# Altium PCB SSOP20.PcbDoc
Units mil, origin at the board's own origin, x right, y up, seen from the top; angles counter-clockwise.
Board outline 835 x 535 mil, 2 copper layers (Top Layer, Bottom Layer); 3 components, 142 nets, 32 pads, 4 vias.
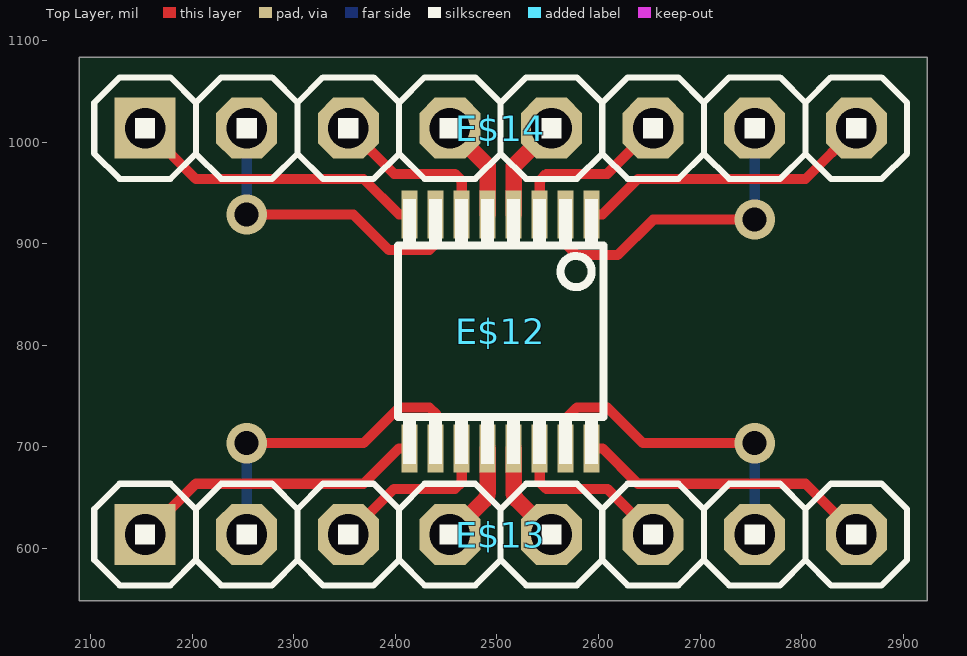
[diagram p0: Top Layer view]
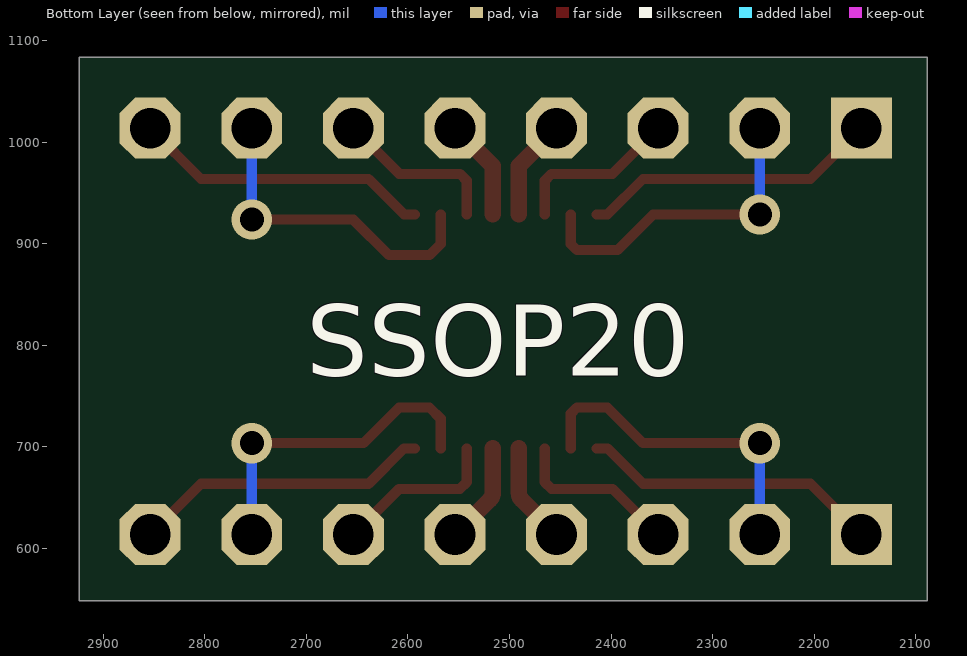
[diagram p1: Bottom Layer view, seen from below]

## Layer stack, top to bottom
Top Layer: signal copper 1.4
Dielectric: dielectric 12.6, FR-4, Dk 4.8
Bottom Layer: signal copper 1.4

## Board outline
2088.67,1083.67 2923.67,1083.67 2923.67,548.67 2088.67,548.67

## Design rules (kind name [scope] priority, off if disabled: settings)
Clearance [All] p1: gap=10
PolygonConnect [All] p1: connectstyle=Relief reliefconductorwidth=10 reliefentries=4 polygonreliefangle="90 Angle"
RoutingVias [All] p1: holewidth=28 width=50 viastyle="Through Hole" minholewidth=28 minwidth=50 maxholewidth=28 maxwidth=50
SilkscreenOverComponentPads [All] p1: minsilkscreentomaskgap=10
SolderMaskExpansion [All] p1: expansion=4
Width [All] p1: maxlimit=10 minlimit=10 preferedwidth=10
27 further rules are at their usual default settings.

## Components (designator, comment, footprint, x,y, rotation, side; value= is the part's Value field where it differs from the comment)
E$12 "Comment" SSOP16 2503.67,813.67 r180 top
E$13 "Comment" 1X08-S 2503.67,613.67 r0 top
E$14 "Comment" 1X08-S 2503.67,1013.67 r0 top

## Footprints (in the part's own frame and the unit in brackets; to place one, negate y for a bottom-side part, rotate by r counter-clockwise, add the part's x,y. Pads: shape width x height; smd on the part's side, far side on the other; paste and mask are expansions set on the pad)
1X08-S [mil]
  rect 60x60 hole 40: 1(-350,0)
  oct 60x60 hole 40: 2(-250,0) 3(-150,0) 4(-50,0) 5(50,0) 6(150,0) 7(250,0) 8(350,0)
  silkscreen extent -400,-50 400,50
SSOP16 [mm]
  rect 0.4x1.2 smd: 1(-2.275,-2.925) 2(-1.625,-2.925) 3(-0.975,-2.925) 4(-0.325,-2.925) 5(0.325,-2.925) 6(0.975,-2.925) 7(1.625,-2.925) 8(2.275,-2.925) 9(2.275,2.925) 10(1.625,2.925) 11(0.975,2.925) 12(0.325,2.925) 13(-0.325,2.925) 14(-0.975,2.925) 15(-1.625,2.925) 16(-2.275,2.925)
  silkscreen extent -2.57,-3.31 2.57,3.32

## Via types
v1: diameter 39.62, hole 23.62, Top Layer to Bottom Layer, 4 vias

## Nets (pads, with @x,y where several pads share a name; then routed paths per layer and width w, separated by ;. In a path a pad name is that pad's centre, name@x,y a point inside that pad or via, vN(x,y) a via of type N, cw(c..) or ccw(c..) an arc to the next point about the centre after c; other vN are vias at no path point)
N$1: 
N$2: 
N$3: 
N$4: 
N$5: 
N$6: 
N$7: 
N$8: 
N$9: 
N$10: 
N$11: 
N$12: 
N$13: 
N$14: 
N$15: 
N$16: 
N$17: 
N$18: 
N$19: 
N$20: 
N$21: 
N$22: 
N$23: 
N$24: 
N$25: 
N$26: 
N$27: 
N$28: 
N$29: 
N$30: 
N$31: 
N$32: 
N$33: 
N$34: 
N$35: 
N$36: 
N$37: 
N$38: 
N$39: 
N$40: 
N$41: 
N$42: 
N$43: 
N$44: 
S$1: 
S$2: 
S$3: 
S$4: 
S$5: 
S$6: 
S$7: 
S$8: 
S$9: 
S$10: 
S$11: 
S$12: 
S$13: 
S$14: 
S$15: 
S$16: 
S$17: 
S$18: 
S$19: 
S$20: 
S$21: 
S$22: 
S$23: 
S$24: 
S$25: 
S$26: 
S$27: 
S$28: 
S$29: 
S$30: 
S$31: 
S$32: 
S$33: 
S$34: 
S$35: 
S$36: 
S$37: 
S$38: 
S$39: 
S$40: 
S$41: 
S$42: 
S$43: 
S$44: 
S$45: 
S$46: 
S$47: 
S$48: 
S$49: 
S$50: 
S$51: 
S$52: 
S$53: 
S$54: 
S$55: E$12.9 E$13.1 | length 295.6
  Top Layer w10: E$13.1 2203.67,663.67 2368.67,663.67 2403.51,698.51 E$12.9
S$56: E$12.10 E$13.2 | length 327.1
  Top Layer w10: v1(2253.67,703.67) 2368.67,703.67 2403.67,738.67 2433.67,738.67 2439.69,732.64 E$12.10
  Bottom Layer w10: E$13.2 v1(2253.67,703.67)
S$57: E$12.11 E$13.3 | length 166.2
  Top Layer w10: E$13.3 2398.67,658.67 2458.67,658.67 2465.28,665.28 E$12.11
S$58: E$12.12 E$13.4 | length 99.8
  Top Layer w16: E$13.4 2487.94,647.94 ccw(c2480.87,655.01) 2490.87,655.01 E$12.12
S$59: E$12.13 E$13.5 | length 99.8
  Top Layer w16: E$12.13 2516.46,655.01 ccw(c2526.46,655.01) 2519.39,647.94 E$13.5
S$60: E$12.14 E$13.6 | length 166.2
  Top Layer w10: E$12.14 2542.05,665.28 2548.67,658.67 2608.67,658.67 E$13.6
S$61: E$12.15 E$13.7 | length 324.2
  Top Layer w10: E$12.15 2567.64,727.64 2578.67,738.67 2608.67,738.67 2643.67,703.67 v1(2753.67,703.67)
  Bottom Layer w10: E$13.7 v1(2753.67,703.67)
S$62: E$12.16 E$13.8 | length 295.6
  Top Layer w10: E$12.16 2603.82,698.51 2638.67,663.67 2803.67,663.67 E$13.8
S$63: E$12.8 E$14.1 | length 295.6
  Top Layer w10: E$14.1 2203.67,963.67 2368.67,963.67 2403.51,928.82 E$12.8
S$64: E$12.7 E$14.2 | length 317.1
  Top Layer w10: v1(2253.67,928.67) 2358.67,928.67 2393.67,893.67 2433.67,893.67 2439.69,899.69 E$12.7
  Bottom Layer w10: v1(2253.67,928.67) E$14.2
S$65: E$12.6 E$14.3 | length 166.2
  Top Layer w10: E$14.3 2398.67,968.67 2458.67,968.67 2465.28,962.05 E$12.6
S$66: E$12.5 E$14.4 | length 100.3
  Top Layer w16: E$14.4 2490.87,976.46 E$12.5
S$67: E$12.4 E$14.5 | length 100.3
  Top Layer w16: E$12.4 2516.46,976.46 E$14.5
S$68: E$12.3 E$14.6 | length 166.2
  Top Layer w10: E$12.3 2542.05,962.05 2548.67,968.67 2608.67,968.67 E$14.6
S$69: E$12.2 E$14.7 | length 324.2
  Top Layer w10: E$12.2 2567.64,899.69 2578.67,888.67 2618.67,888.67 2653.67,923.67 v1(2753.67,923.67)
  Bottom Layer w10: v1(2753.67,923.67) E$14.7
S$70: E$12.1 E$14.8 | length 295.6
  Top Layer w10: E$12.1 2603.82,928.82 2638.67,963.67 2803.67,963.67 E$14.8
S$71: 
S$72: 
S$73: 
S$74: 
S$75: 
S$76: 
S$77: 
S$78: 
S$79: 
S$80: 
S$81: 
S$82: 
S$83: 
S$84: 
S$85: 
S$86: 
S$87: 
S$88: 
S$89: 
S$90: 
S$91: 
S$92: 
S$93: 
S$94: 
S$95: 
S$96: 
S$97: 
S$98: 

## Silkscreen, mask and mechanical layers (free items; w line width, h text height)
Bottom Overlay:
  text "SSOP20" at 2700,770 h70